# EAGLE board H1DR01 (EAGLE 9.6.1)
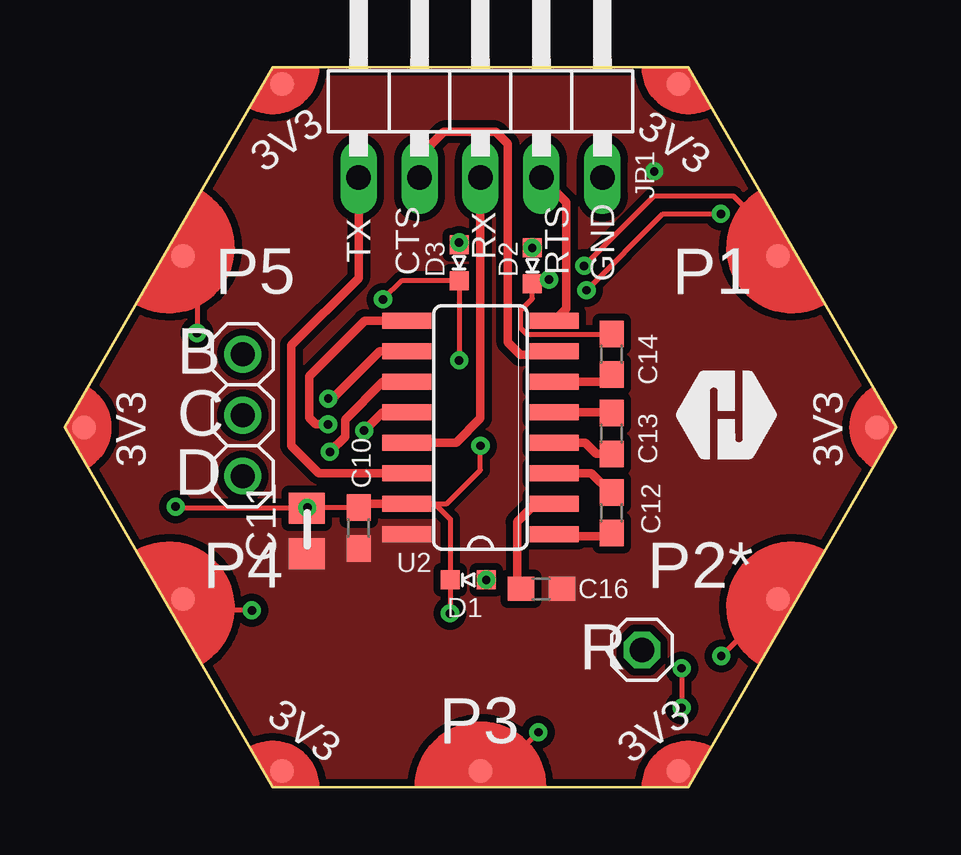
[diagram p0: board, top side]
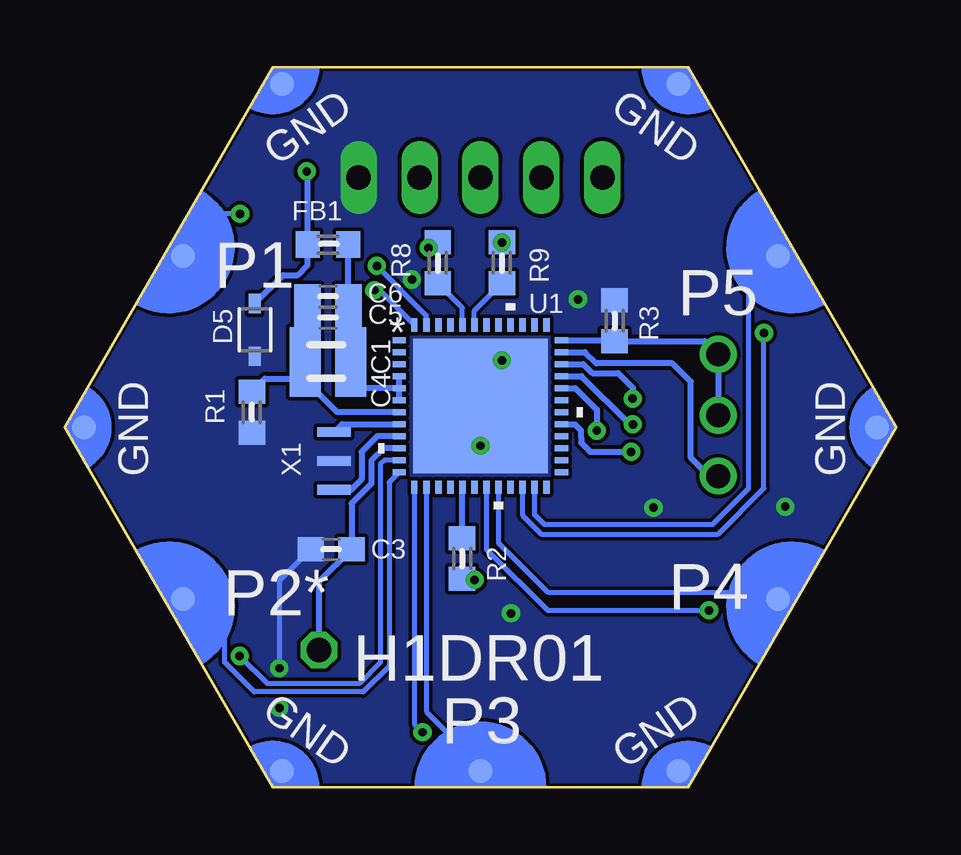
[diagram p1: board, bottom side, seen from below]

Size 34.64 x 30 mm. Coordinates in mm from the lower left corner, seen from the top.
Copper layers (1*16): Top 0.035mm / dielectric 1.5mm / Bottom 0.035mm
Design rules "2_layer": minimum track width 7mil, minimum drill 10mil, track to track 6mil, track to pad 6mil, pad to pad 6mil, via to via 6mil, smd to smd 0mil, copper to edge 1mil, drill to drill 8mil, minimum pad ring 10mil, minimum via ring 8mil, stop-mask expansion 2mil, vias tented up to drill 15mil, thermal gap 10mil

## Footprints (pad centres in the part's own frame; a part is rotated, then mirrored left to right if it is on the bottom)
C-0805 = smd 1.3 x 1.5: 1 -0.95,0; 2 0.95,0
C-0603 = smd 1.1 x 1: 1 -0.85,0; 2 0.85,0
VLMS1300-GS08 = smd 0.8 x 0.8: A 0,0.75; C 0,-0.75
BOURNS_CDSOD323-T03SC_0 = smd 0.8 x 0.5: 1 -1.1,0; 2 1.1,0
FB-0603 = smd 1 x 1.1: 1 -0.85,0; 2 0.85,0
1X05/90 = drill 1.016 long: 1 -5.08,-3.81; 2 -2.54,-3.81; 3 0,-3.81; 4 2.54,-3.81; 5 5.08,-3.81
HEXABIT_17.32_NO_P6 = smd 1 x 1 bottom: PAD_PD1 12.39,7.15; PAD_PD2 12.39,-7.15; PAD_PD3 0,-14.31; PAD_PD4 -12.39,-7.15; PAD_PD5 -12.39,7.15; PAD_PD7 8.26,14.31; PAD_PD8 16.52,0; PAD_PD9 8.26,-14.31; PAD_PD10 -8.26,-14.31; PAD_PD11 -16.52,0; PAD_PD12 -8.26,14.31 | smd 1 x 1: PAD_PU1 12.39,7.15; PAD_PU2 12.39,-7.15; PAD_PU3 0,-14.31; PAD_PU4 -12.39,-7.15; PAD_PU5 -12.39,7.15; PAD_PU7 8.26,14.31; PAD_PU8 16.52,0; PAD_PU9 8.26,-14.31; PAD_PU10 -8.26,-14.31; PAD_PU11 -16.52,0; PAD_PU12 -8.26,14.31
1X01 = drill 1.016 octagon: 1 0,0
R-0603 = smd 1 x 1.1: 1 -0.85,0; 2 0.85,0
1X03 = drill 1.016: 1 -2.54,0; 2 0,0; 3 2.54,0
QFN_B1CEU6_STM-L = smd 0.55 x 0.254: 1 -3.38,2.751; 2 -3.38,2.251; 3 -3.38,1.75; 4 -3.38,1.25; 5 -3.38,0.75; 6 -3.38,0.25; 7 -3.38,-0.25; 8 -3.38,-0.75; 9 -3.38,-1.25; 10 -3.38,-1.75; 11 -3.38,-2.251; 12 -3.38,-2.751; 25 3.38,-2.751; 26 3.38,-2.251; 27 3.38,-1.75; 28 3.38,-1.25; 29 3.38,-0.75; 30 3.38,-0.25; 31 3.38,0.25; 32 3.38,0.75; 33 3.38,1.25; 34 3.38,1.75; 35 3.38,2.251; 36 3.38,2.751 | smd 0.254 x 0.55: 13 -2.751,-3.38; 14 -2.251,-3.38; 15 -1.75,-3.38; 16 -1.25,-3.38; 17 -0.75,-3.38; 18 -0.25,-3.38; 19 0.25,-3.38; 20 0.75,-3.38; 21 1.25,-3.38; 22 1.75,-3.38; 23 2.251,-3.38; 24 2.751,-3.38; 37 2.751,3.38; 38 2.251,3.38; 39 1.75,3.38; 40 1.25,3.38; 41 0.75,3.38; 42 0.25,3.38; 43 -0.25,3.38; 44 -0.75,3.38; 45 -1.25,3.38; 46 -1.75,3.38; 47 -2.251,3.38; 48 -2.751,3.38 | smd 5.6 x 5.6: 49 0,0
SO16 = smd 0.66 x 2.032: 1 -4.445,-3.073; 2 -3.175,-3.073; 3 -1.905,-3.073; 4 -0.635,-3.073; 5 0.635,-3.073; 6 1.905,-3.073; 7 3.175,-3.073; 8 4.445,-3.073; 9 4.445,3.073; 10 3.175,3.073; 11 1.905,3.073; 12 0.635,3.073; 13 -0.635,3.073; 14 -1.905,3.073; 15 -3.175,3.073; 16 -4.445,3.073
XTALL_CSTCE8M00G52 = smd 1.4 x 0.4: P$1 0,1.2; P$2 0,0; P$3 0,-1.2

## Placement (x,y rotation side)
C1  1uF  [C-0805]  23.67,18.43 180 bottom
C3  100nF  [C-0603]  23.54,9.92 180 bottom
C4  4.7uF  [C-0805]  23.67,17.03 180 bottom
C5  100nF  [C-0603]  23.67,19.57 180 bottom
C6  100nF  [C-0603]  23.67,20.46 180 bottom
C10  100nF  [C-0603]  12.24,10.81 90 top
C11  4.7uF  [C-0805]  10.08,10.68 90 top
C12  100nF  [C-0603]  22.78,11.44 270 top
C13  100nF  [C-0603]  22.78,14.75 270 top
C14  100nF  [C-0603]  22.78,18.05 90 top
C16  100nF  [C-0603]  19.86,8.27 0 top
D1  RED  [VLMS1300-GS08]  16.81,8.65 270 top
D2  YELLOW  [VLMS1300-GS08]  19.48,21.73 0 top
D3  ORANGE  [VLMS1300-GS08]  16.43,21.86 0 top
D5  BOURNS_CDSOD323-T03SCBOURNS_CDSOD323-T03SC_0_0  [BOURNS_CDSOD323-T03SC_0]  26.72,19.06 90 bottom
FB1  FB-TDK_MMZ1608Y300B  [FB-0603]  23.67,22.62 180 bottom
JP1  [1X05/90]  17.32,29.22 0 top
P1  HEXABIT_17.32_NO_P6  [HEXABIT_17.32_NO_P6]  17.32,15 0 top
R  R  [1X01]  24.05,5.73 0 top
R1  0.0R  [R-0603]  26.84,15.63 90 bottom
R2  270R  [R-0603]  18.08,9.54 270 bottom
R3  10K  [R-0603]  11.73,19.45 270 bottom
R8  270.0R  [R-0603]  19.1,21.86 270 bottom
R9  270.0R  [R-0603]  16.43,21.86 270 bottom
SWD  [1X03]  7.41,15.51 270 top
U1  STM32G0B1CEU6QFN_B1CEU6_STM-L  [QFN_B1CEU6_STM-L]  17.32,15.89 0 bottom
U2  MAX3232CSE  [SO16]  17.32,15 90 top
U$1  [HEXA-LOGO]  27.58,13.67 0 top
X1  XTALL_CSTCE8M00G52  [XTALL_CSTCE8M00G52]  23.42,13.6 180 bottom

## Library data of the parts
C1 C3-C6 C11 R2 R3 R8 R9 = HEXABITZ_RCLS
C10 = Hexabitz; CAPACITANCE: 100nF; MFN: KEMET; MPN: C0603C104K8RACTU; OCTOPART_URL: https://octopart.com/c0603c104k8ractu-kemet-145075?r=sp&s=9bS9ASSwSEqMCE9KBEQZ0g; TOLERANCE: 10%; VOLTAGE_RATING: 10V
C12-C14 C16 = Hexabitz; CAPACITANCE: 100nF; MFN: KEMET; MPN: C0603C104K8RACTU; OCTOPART_URL: https://octopart.com/c0603c104k8ractu-kemet-145075?r=sp&s=9bS9ASSwSEqMCE9KBEQZ0g; TOLERANCE: 10%; VOLTAGE_RATING: 10
D1-D3 = HEXABITZ_USER_INTERFACE_PARTS; MFN: Vishay; MPN: VLMS1300-GS08; OCTOPART_URL: https://octopart.com/vlms1300-gs08-vishay-21709201?r=sp&s=_gcP4_q8T1SC6PJQPTQ9yA
D5 = HEXABITZ_RCLS; DESCRIPTION: Dio Tvs Vwm 03V 500W Bidir Sod323 / Tape & Reel - 7" Reel; MFN: Bourns; MPN: CDSOD323-T03SC; OCTOPART_URL: https://octopart.com/cdsod323-t03sc-bourns-10487153?r=sp
FB1 = HEXABITZ_RCLS; MFN: TDK; MPN: MMZ1608Y300B; OCTOPART_URL: https://octopart.com/mmz1608y300b-tdk-368280?r=sp&s=cd9_2ZEqQ9q9UNBuQgHAiA
JP1 = Hexabitz; DESCRIPTION: Conn Header R/a 5POS 2.54MM MALE; MFN: Sullins; MPN: PEC05SBAN; OCTOPART_URL: https://octopart.com/pec05sban-sullins-264498?r=sp
P1 = hexabitz_connectors
R = HEXABITZ_USER_INTERFACE_PARTS; MFN: TE Connectivity; MPN: 87227-1; OCTOPART_URL: https://octopart.com/87227-1-te+connectivity-39512052?r=sp
R1 = HEXABITZ_RCLS; MFN: Yageo; MPN: RC0603JR-070RL; OCTOPART_URL: https://octopart.com/rc0603jr-070rl-yageo-1241539?r=sp&s=X2NteqRjRNWrnx42Y0aliA; RESISTANCE: 0.0 Ohm
SWD = pinhead
U1 = HEXABITZ_ICs; COPYRIGHT: Copyright (C) 2021 Ultra Librarian. All rights reserved.; MANUFACTURER_PART_NUMBER: STM32G0B1CEU6; MFR_NAME: STMicroelectronics; SPICEPREFIX: X
U2 = Hexabitz; DESCRIPTION: MAX3232 Series 235 kbps 5.5 V Surface Mount RS-232 Transceiver - SOIC-16; MFN: Maxim Integrated; MPN: MAX3232CSE; OCTOPART_URL: https://octopart.com/max3232cse%2B-maxim+integrated-39430845?r=sp; OC_FARNELL: 9725490; OC_NEWARK: 90C2890
U$1 = HEXABITZ_USER_INTERFACE_PARTS
X1 = HEXABITZ_RCLS; MFN: Murata; MPN: CSTCE8M00G52Z-R0; OCTOPART_URL: https://octopart.com/cstce8m00g52z-r0-murata-17755941?r=sp&s=JDnNJnrHQhyS8Zk4ofFWXw

## Nets
CLK: R3.2 SWD.1 SWD.2 U1.36
CTS_OUT: JP1.2 U2.7
DATA: SWD.3 U1.35
GND: C3.2 C10.2 C11.2 C14.2 D1.C D2.C D3.C D5.1 JP1.5 P1.PAD_PD7 P1.PAD_PD8 P1.PAD_PD9 P1.PAD_PD10 P1.PAD_PD11 P1.PAD_PD12 R1.1 R3.1 U1.49 U2.15 X1.P$2
N$1: D1.A R2.2
N$3: R2.1 U1.17
N$4: C3.1 R.1 U1.10
N$5: U1.9 X1.P$1
N$6: U1.8 X1.P$3
N$9: R8.2 U1.44
N$11: R9.2 U1.43
N$12: D3.A R9.1
N$13: D2.A R8.1
N$19: C14.1 U2.6
N$20: C16.1 U2.2
N$21: C12.2 U2.1
N$22: C12.1 U2.3
N$23: C13.2 U2.4
N$24: C13.1 U2.5
RTS_OUT: JP1.4 U2.8
RX_OUT: JP1.3 U2.13
TX_OUT: JP1.1 U2.14
UART1_CTS: U1.33 U2.9
UART1_RTS: U1.34 U2.10
UART1_RX: U1.32 U2.12
UART1_TX: U1.29 U2.11
USART2_RX: P1.PAD_PD3 U1.14
USART2_TX: P1.PAD_PU3 U1.13
USART3_RX: P1.PAD_PD5 U1.23
USART3_TX: P1.PAD_PU5 U1.22
USART4_RX: P1.PAD_PD2 U1.12
USART4_TX: P1.PAD_PU2 U1.11
USART5_RX: P1.PAD_PD4 U1.20
USART5_TX: P1.PAD_PU4 U1.19
USART6_RX: P1.PAD_PD1 U1.48
USART6_TX: P1.PAD_PU1 U1.47
VDD: C10.1 C11.1 C16.2 D5.2 FB1.2 P1.PAD_PU7 P1.PAD_PU8 P1.PAD_PU9 P1.PAD_PU10 P1.PAD_PU11 P1.PAD_PU12 U2.16
VDDA: C1.1 C4.1 C5.1 C6.1 FB1.1 U1.4 U1.5 U1.6
VSSA: C1.2 C4.2 C5.2 C6.2 R1.2 U1.7

## Tracks (layer width: path | path; a pad name or v marks a point on that pad's centre or on a via)
CLK
  Bottom 0.254: SWD.2 SWD.1 7.8,18.43 7.88,18.52 7.96,18.59 R3.2 11.78,18.64 U1.36
CTS_OUT
  Top 0.356: U2.7 20.24,18.02 18.99,18.02 18.46,18.55 18.46,26.81 17.95,27.32 15.8,27.32 14.78,26.3 JP1.2
DATA
  Bottom 0.254: SWD.3 7.8,12.97 8.56,13.73 8.56,16.91 9.32,17.67 12.49,17.67 12.97,18.14 U1.35
GND  (via drill 0.35)
  Top 0.203: v13.26,20.33 14.03,21.11 D3.C v16.43,17.79 | v20.18,21.17 19.99,20.98 D2.C 19.48,20.36 19,19.88 19,19.14 19.27,18.86 22.74,18.86 C14.2 | v16.05,7.25 16.06,7.27 D1.C 16.06,11.18 15.41,11.82 U2.15 15.92,11.82 17.32,13.22 v17.32,14.24 | v25.7,4.97 v25.7,3.32 | C10.2 v10.11,11.66 C11.2 4.69,11.63 v4.62,11.7
  Top 0.356: C10.2 12.41,11.82 U2.15
  Bottom 0.203: C3.2 25.7,8.61 v25.7,4.97
  pour Bottom (isolate 0.102, no thermals): 8.61,-0.05 25.93,-0.05 34.59,14.95 25.93,29.95 8.61,29.95 -0.05,14.95
N$1  (via drill 0.35)
  Bottom 0.203: R2.2 18.04,8.65 D1.A
  other vias: 17.56,8.65
N$3
  Bottom 0.254: R2.1 18.08,12.5 U1.17
N$4
  Bottom 0.254: U1.10 21.36,14.14 21.87,13.63 21.87,12.66 22.69,11.83 C3.1 24.05,8.56 R.1
N$5
  Bottom 0.254: U1.9 21.62,14.64 22.27,13.98 22.27,12.84 22.71,12.4 X1.P$1
N$6
  Bottom 0.254: X1.P$3 23.08,15.14 U1.8
N$9
  Bottom 0.203: U1.44 18.07,19.98 R8.2
N$11
  Bottom 0.203: U1.43 17.57,19.87 R9.2
N$12  (via drill 0.35)
  Top 0.203: R9.1 D3.A
  other vias: 16.43,22.71
N$13  (via drill 0.35)
  Bottom 0.203: R8.1 19.25,22.71 D2.A
  other vias: 19.48,22.48
N$19
  Top 0.356: C14.1 22.49,16.91 U2.6
N$20
  Top 0.356: U2.2 19.61,11.82 18.84,11.06 18.84,8.44 C16.1
N$21
  Top 0.356: U2.1 20.48,10.47 22.65,10.47 C12.2
N$22
  Top 0.356: C12.1 22.74,12.29 21.94,13.09 U2.3
N$23
  Top 0.356: U2.4 21.68,14.37 22.15,13.9 C13.2
N$24
  Top 0.356: U2.5 22.74,15.63 C13.1
RTS_OUT
  Top 0.356: U2.8 20.9,19.95 20.9,24.37 JP1.4
RX_OUT
  Top 0.356: JP1.3 17.32,15.38 16.3,14.37 U2.13
TX_OUT
  Top 0.356: JP1.1 12.24,21.22 9.45,18.43 9.45,14.24 10.59,13.09 U2.14
UART1_CTS  (via drill 0.35)
  Top 0.356: U2.9 12.49,19.45 10.18,17.13 10.18,15.41 10.46,15.13 v10.97,15.13
  Bottom 0.254: U1.33 13.12,17.14 11.1,15.13 v10.97,15.13
UART1_RTS  (via drill 0.35)
  Top 0.356: v10.98,16.2 11.15,16.2 13.13,18.17 U2.10
  Bottom 0.254: U1.34 13.04,17.64 12.66,17.26 11.58,17.26 10.97,16.65 v10.97,16.21 v10.98,16.2
UART1_RX  (via drill 0.35)
  Top 0.356: v12.47,14.87 13.24,15.63 U2.12
  Bottom 0.254: U1.32 13.37,16.64 12.47,15.74 v12.47,14.87
UART1_TX  (via drill 0.35)
  Top 0.356: U2.11 13.26,16.91 11.68,15.33 11.68,14.62 v11.04,13.98
  Bottom 0.254: U1.29 13.93,15.13 13.38,15.13 13.13,14.88 13.13,14.59 13.13,14.37 12.75,13.98 v11.04,13.98
USART2_RX
  Bottom 0.203: U1.14 19.57,3.15 17.32,0.9 P1.PAD_PD3
USART2_TX  (via drill 0.35)
  Top 0.203: v19.73,2.3 18.12,0.69 P1.PAD_PU3
  Top 0.356: 17.27,0.98 P1.PAD_PU3
  Bottom 0.203: U1.13 20.07,2.64 v19.73,2.3
USART3_RX
  Bottom 0.203: U1.23 15.07,11.38 14.65,10.96 7.64,10.96 6.14,12.46 6.14,20.94 P1.PAD_PD5
USART3_TX  (via drill 0.35)
  Top 0.203: P1.PAD_PU5 5.51,21.57 v5.51,18.94
  Bottom 0.203: U1.22 15.57,11.34 14.78,10.55 7.41,10.55 5.51,12.46 v5.51,18.94
USART4_RX
  Bottom 0.203: U1.12 21.13,12.71 21.13,5.06 22.21,3.98 26.75,3.98 27.98,5.21 27.98,6.12 P1.PAD_PD2
USART4_TX  (via drill 0.35)
  Top 0.203: v27.35,5.48 29.71,7.83 P1.PAD_PU2
  Bottom 0.203: U1.11 21.32,13.64 21.49,13.47 21.49,5.21 22.36,4.33 26.21,4.33 v27.35,5.48
USART5_RX
  Bottom 0.203: U1.20 16.57,10.19 14.53,8.14 5.22,8.14
  Bottom 0.254: 5.22,8.14 P1.PAD_PD4
USART5_TX  (via drill 0.35)
  Top 0.203: v7.8,7.38 5.4,7.38 P1.PAD_PU4
  Bottom 0.203: U1.19 17.07,9.92 14.53,7.38 v7.8,7.38
USART6_RX  (via drill 0.35)
  Top 0.203: v27.34,23.9 24.92,23.9 v21.74,20.72
  Bottom 0.203: U1.48 21.52,20.72 v21.74,20.72 | v27.34,23.9 27.96,23.9 P1.PAD_PD1
USART6_TX  (via drill 0.35)
  Top 0.203: v21.64,21.73 24.56,24.65 27.86,24.65 29.71,22.8 P1.PAD_PU1
  Bottom 0.203: U1.47 19.57,19.66 v21.64,21.73
VDD  (via drill 0.35)
  Bottom 0.254: D5.2 25.53,21.35 24.94,21.35 24.52,21.77 FB1.2 24.52,25.63 v24.56,25.67
  pour Top (isolate 0.305, no thermals): 8.61,-0.05 25.93,-0.05 34.59,14.95 25.93,29.95 8.61,29.95 -0.05,14.95
VDDA
  Bottom 0.254: U1.6 U1.5 | U1.5 U1.4 | U1.5 22.33,16.64 C4.1 C1.1 22.72,19.47 C5.1 C6.1 FB1.1
VSSA
  Bottom 0.254: C6.2 C5.2 24.62,19.47 C1.2 C4.2 24.69,17.03 | R1.2 26.3,17.03 24.69,17.03 | U1.7 23.29,15.64 24.69,17.03

## Text on the board
tPlace: 3V3 | 3V3 | TX | RX | P5 | CTS | RTS | GND | P1 | 3V3 | 3V3 | P4 | P2* | 3V3 | P3 | 3V3
bPlace: GND | GND | P1 | P5 | GND | GND | P4 | P2* | H1DR01 | GND | P3 | GND
tNames: B | C | D